# Altium PCB SV601187A.PcbDoc (part 2 of 2)
Units mil, origin at the board's own origin, x right, y up, seen from the top; angles counter-clockwise.
Board outline 3260 x 1865 mil, 4 copper layers (Top Layer, MidLayer1, MidLayer2, Bottom Layer), stack 61.2 mil thick; 103 components, 64 nets, 340 pads, 114 vias.
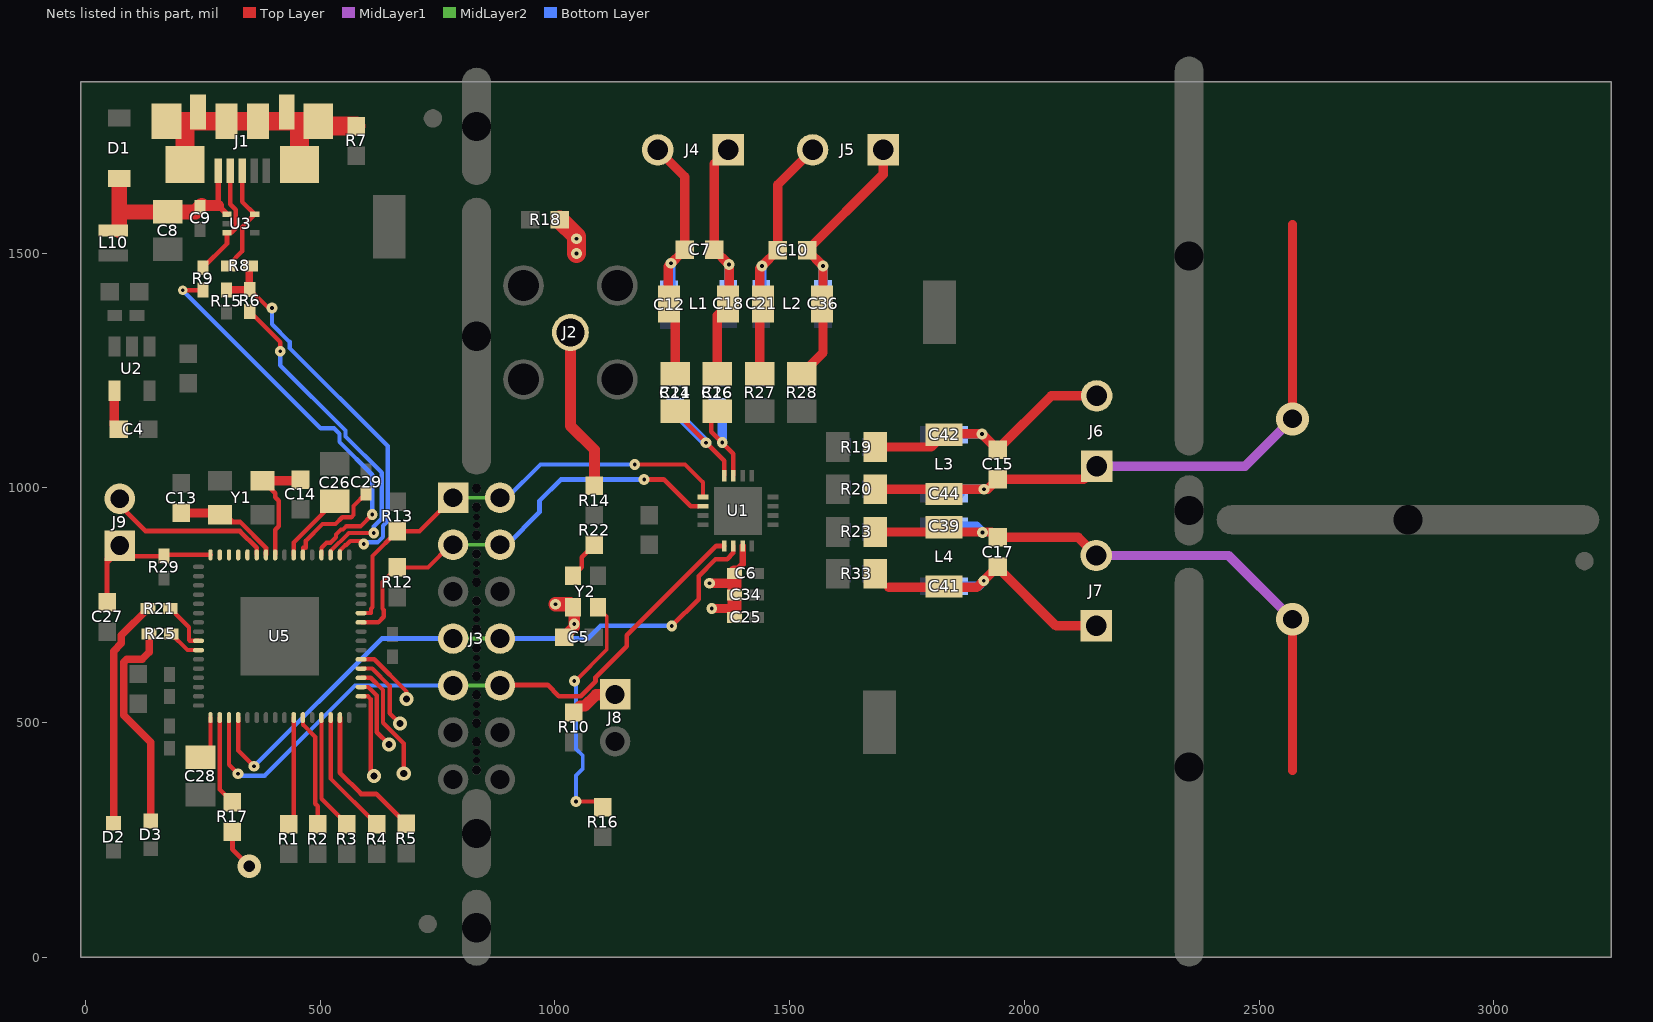
[diagram p4: the nets of this part, all layers, seen from the top]

## Via types
v1: diameter 23, hole 8, Top Layer to Bottom Layer, tented both sides, 77 vias
v2: diameter 19.68, hole 7.87, Top Layer to Bottom Layer, 18 vias
v3: diameter 20, hole 8, Top Layer to Bottom Layer, tented both sides, 8 vias
v4: diameter 30, hole 15, Top Layer to Bottom Layer, 5 vias
v5: diameter 50, hole 28, Top Layer to Bottom Layer, 2 vias
v6: diameter 50, hole 25, Top Layer to Bottom Layer, 2 vias
v7: diameter 70, hole 40, Top Layer to Bottom Layer, 2 vias

## Nets (pads, with @x,y where several pads share a name; then routed paths per layer and width w, separated by ;. In a path a pad name is that pad's centre, name@x,y a point inside that pad or via, vN(x,y) a via of type N, cw(c..) or ccw(c..) an arc to the next point about the centre after c; other vN are vias at no path point) (continued)
IN3A: C16.1 R26.1 U1.15 | length 228.4
  Top Layer w10: R26.1@1333,1150 1333,1120 1380.16,1072.84 U1.15@1380.16,1025.8
  Bottom Layer w10: C16.1@1356.58,1160.92 C16.1@1356.58,1166.08
  Bottom Layer w20: C16.1@1346,1171.5 1356.58,1160.92 v1(1356.58,1096.42)
IN3B: C11.2 R24.1 U1.16 | length 283.3
  Top Layer w10: R24.1@1256,1163 1256,1162 v1(1322,1096) 1360.47,1057.53 U1.16@1360.47,1025.8
  Bottom Layer w20: C11.2@1256,1171.5 1256,1162 v1(1322,1096)
INTB: J3.9 J3.10 U1.5 U5.19 | length 1382.5
  Top Layer w9: U5.19@305.71,510.77 305.71,410.3 v1(325,391)
  Top Layer w10: U1.5@1360.47,876.2 1343.58,876.2 1153.26,685.88 1153.26,662.88 1091.87,601.48 1091.79,601.48 1086.52,596.21 1086.52,587.98 1054.87,556.32 1008.47,556.32 984.62,580.18 J3.10@898,580.18 ; J3.10@898,580.18 898,579 J3.10@898,580.18
  MidLayer2 w8: J3.9@783,579 J3.10@873,579
  Bottom Layer w9: v1(325,391) 329,387 381.95,387 573.95,579 J3.9@783,579
JTAG_RST: C27.2 J9.1 R29.2 U5.64 | length 506.5
  Top Layer w10: C27.2@46,756.5 46,840 ; 46,840 71,865 81.38,854.62 J9.1@95.38,854.62 ; 46,840 46,850 J9.1@73,877 J9.1@95.38,854.62 ; J9.1@95.38,854.62 R29.2@167,854.62 R29.2@164.39,857.23 ; R29.2@164.39,857.23 U5.64@266.33,857.23 R29.2@164.39,857.23
JTAG_TCK: U5.63
JTAG_TDI: U5.61
JTAG_TDO: U5.60
JTAG_TEST: J9.2 U5.59 | length 352.9
  Top Layer w10: J9.2@67,969 128,908 329.09,908 364.78,872.32 U5.59@364.78,857.23
JTAG_TMS: U5.62
MSP_DM: R9.2 U5.52 | length 861.3
  Top Layer w9: v3(207,1421) 249.62,1421 R9.2@250,1421.38 ; U5.52@502.61,857.23 502.61,872.43 513.18,883 521.77,883 533.49,894.72 533.49,900.49 544.32,911.32 548.61,911.32 555.29,918 586,918 v1(611,943)
  Bottom Layer w9: v3(207,1421) 501,1127 529.28,1127 541,1115.28 541,1098 611,1028 v1(611,943)
MSP_DP: R6.1 R8.2 R15.2 U5.50 | length 922.6
  Top Layer w9: R6.1@350,1422.62 389.7,1382.92 v1(397.42,1382.92) ; U5.50@541.98,857.23 541.99,866.45 553.08,877.54 554.54,877.54 564,887 586.37,887 v1(592.84,880.53)
  Top Layer w16: R15.2@300,1421.62 R6.1@349,1421.62 ; R6.1@349,1421.62 349,1470.38 R6.1@349,1421.62
  Bottom Layer w9: v1(397.42,1382.92) 397.42,1348.58 435,1311 435,1297.93 644,1088.93 644,929.33 634,919.33 634,895.72 622.28,884 596.3,884 v1(592.84,880.53)
MSP_PUR: R6.2 U5.51 | length 710.5
  Top Layer w9: R6.2@350,1375.38 415,1310.38 v1(415,1291) ; U5.51@522.3,857.23 522.3,865.14 561,903.84 613.84,903.84 v1(614,904)
  Bottom Layer w9: v1(415,1291) 415,1261 554,1122 554,1109.38 631,1032.38 631,934.72 614,917.72 v1(614,904)
MSPACLK: R17.2 | length 88.4
  Top Layer w10: R17.2@313,267.5 313,230 v6(349,194)
NetC4_1: C4.1 U2.4 | length 85.4
  Top Layer w20: U2.4@61.6,1206.76 61.6,1133.91 C4.1@70.5,1125
NetC7_1: C7.1 C12.2 J4.2 L1.2 R24.2 | length 630.4
  Top Layer w20: J4.2@1219,1720 1276.5,1662.5 C7.1@1276.5,1507 ; R24.2@1256,1243 1256,1377.04 1241.04,1392 v1@1241.04,1471.54 ; v1@1241.04,1471.54 C7.1@1276.5,1507 ; v1@1241.04,1471.54 C7.1@1276.5,1507
  Bottom Layer w20: C12.2@1243,1421.54 1246.98,1425.51 v1(1246.98,1478.46)
NetC7_2: C7.2 C18.1 J4.1 L1.1 R26.2 | length 565.4
  Top Layer w20: R26.2@1346,1243 1346,1367.04 1370.96,1392 v1(1370.96,1475.54) C7.2@1339.5,1507 1339.5,1690.5 J4.1@1369,1720
  Bottom Layer w20: C18.1@1368.99,1423.5 1370.96,1425.46 v1(1370.96,1475.54)
NetC10_1: C10.1 C21.2 J5.2 L2.2 R27.2 | length 798.1
  Top Layer w20: J5.2@1549,1720 1474.5,1645.5 C10.1@1474.5,1506 v1(1441,1472.5) v1@1436,1467.5 ; v1@1436,1467.5 R27.2@1436,1243 v1@1436,1467.5
  Bottom Layer w20: C21.2@1439.07,1423.5 1441,1425.43 v1(1441,1472.5)
NetC10_2: C10.2 C36.1 J5.1 L2.1 R28.2 | length 625.4
  Top Layer w20: R28.2@1526,1243 1570.96,1287.96 1570.96,1392 v1(1570.96,1472.54) C10.2@1537.5,1506 1699,1667.5 J5.1@1699,1720
  Bottom Layer w20: C36.1@1570.96,1423.5 v1(1570.96,1472.54)
NetC13_2: C13.2 U5.58 Y1.3 | length 226.3
  Top Layer w10: Y1.3@286.72,942.58 299.11,942.58 314.44,927.26 329.64,927.26 384.47,872.43 U5.58@384.46,857.23
  Top Layer w20: C13.2@204,946.5 282.8,946.5 Y1.3@286.72,942.58
NetC14_2: C14.2 U5.57 Y1.1 | length 257.3
  Top Layer w10: Y1.1@377.28,1015.42 404.16,988.54 404.16,979.96 411.87,972.25 411.87,918.19 404.16,910.47 U5.57@404.15,857.23
  Top Layer w20: Y1.1@377.28,1015.42 455.92,1015.42 C14.2@458,1017.5
NetC15_1: C15.1 C42.2 J6.2 L3.2 R19.2 | length 594.7
  Top Layer w20: R19.2@1682,1087 1801.04,1087 1829,1114.96 v1(1909.54,1114.96) C15.1@1943,1081.5 2057.5,1196 J6.2@2154,1196
  Bottom Layer w20: C42.2@1860.5,1112.99 1862.46,1114.96 v1(1909.54,1114.96)
NetC15_2: C15.2 C44.1 J6.1 L3.1 R20.2 | length 1654.8
  Top Layer w20: J6.1@2154,1046 2126.5,1018.5 C15.2@1943,1018.5 1921.5,997 v1(1914,997) ; v7(2571,1147) 2571,1561 ; v1(1914,997) R20.2@1682,997 v1(1914,997)
  MidLayer1 w20: J6.1@2154,1046 2470,1046 v7(2571,1147)
  Bottom Layer w20: C44.1@1860.5,987.01 1870.49,997 v1(1914,997)
NetC17_1: C17.1 C39.2 J7.2 L4.2 R23.2 | length 1592.4
  Top Layer w20: J7.2@2153,856 2114.5,894.5 1942,894.5 C17.1@1930.5,906 ; 2571,398 v7(2571,720) ; C17.1@1930.5,906 R23.2@1682,906 C17.1@1930.5,906
  MidLayer1 w20: J7.2@2153,856 2435,856 v7(2571,720)
  Bottom Layer w20: C39.2@1860.5,917.96 1898.04,917.96 v1(1911,905)
NetC17_2: C17.2 C41.1 J7.1 L4.1 R33.2 | length 808.9
  Top Layer w20: 1710.96,788.04 1829,788.04 1898.54,788.04 ; J7.1@2153,706 2067.5,706 ; 1898.54,788.04 C17.2@1942,831.5 ; 1898.54,788.04 C17.2@1942,831.5 ; C17.2@1942,831.5 2067.5,706 ; C17.2@1942,831.5 2067.5,706
  Bottom Layer w20: C41.1@1860.5,790.01 1901.49,790.01 v1(1913.46,801.98)
NetC26_1: C26.1 U5.55 | length 150
  Top Layer w9: U5.55@443.54,857.23 443.54,883.54 C26.1@531,971
NetC28_1: C28.1 U5.17 | length 132.7
  Top Layer w9: U5.17@266.33,510.77 266.5,510.6 C28.1@266.5,439 ; C28.1@266.5,439 245,417.5 C28.1@266.5,439
NetD2_1: D2.1 R21.2 | length 487.9
  Top Layer w16: D2.1@60,285.53 60,652.15 76.7,668.85 76.7,686.32 R21.2@133.38,743
NetD3_1: D3.1 R25.2 | length 463.6
  Top Layer w16: R25.2@135.38,689 135.38,650.13 120.43,635.18 88.33,635.18 81.3,628.15 81.3,515.85 139,458.15 139,304.53 D3.1@139,290.53
NetJ1_2: J1.2 R9.1 U3.3 | length 246.1
  Top Layer w10: R9.1@250,1468.62 301.47,1520.09 U3.3@301.47,1543.32 310.26,1543.32 320.31,1553.37 320.31,1592.32 308.41,1604.22 J1.2@308.41,1675.49
NetJ1_3: J1.3 R8.1 U3.5 | length 236.7
  Top Layer w9: R8.1@304.38,1473 304.38,1474.47 333.81,1503.91 333.81,1555.97 U3.5@360.53,1582.69 334,1609.21 J1.3@334,1675.49
NetJ1_6: J1.6 J1.7 J1.8 J1.9 J1.10 J1.11 J1.12 J1.13 R7.2 | length 941.5
  Top Layer w40: J1.13@178,1781 J1.8@495.42,1781 J1.10@367.46,1781 J1.11@300.54,1781 ; J1.7@211.95,1688.48 211.95,1779.95 ; J1.6@456.05,1688.48 456.05,1777.95 ; J1.8@505.92,1770.5 R7.2@577,1770.5 ; J1.11@300.54,1781 211.95,1781 239.51,1781 J1.11@300.54,1781
NetJ2_1: J2.1 R14.1 | length 347.6
  Top Layer w23: J2.1@1033,1331 1033,1132 1084,1081 R14.1@1084,1004.5
NetR1_1: R1.1 U5.26 | length 231.6
  Top Layer w9: R1.1@433,283.5 443.54,294.03 U5.26@443.54,510.77
NetR2_1: R2.1 U5.27 | length 240.4
  Top Layer w9: U5.27@463.22,510.77 463.23,495.57 489.61,469.19 489.61,327.11 495,321.72 R2.1@495,283.5
NetR3_1: R3.1 U5.29 | length 249.8
  Top Layer w9: U5.29@502.61,510.77 502.61,337.89 R3.1@557,283.5
NetR4_1: R4.1 U5.30 | length 267.7
  Top Layer w9: U5.30@522.3,510.77 522.3,381.2 R4.1@620,283.5
NetR5_1: R5.1 U5.31 | length 303.7
  Top Layer w10: U5.31@541.98,510.77 541.99,393.02 587,348 619.5,348 R5.1@683,284.5
NetR16_2: R16.2 Y2.1 | length 527
  Top Layer w8: v1(1041.4,588.82) 1043.71,588.82 1110.43,655.55 1110.43,726.68 Y2.1@1091.57,745.54 ; v1(1045,332) 1089.5,332 R16.2@1102,319.5
  Bottom Layer w8: v1(1041.4,588.82) 1045,585.23 1045,444 1059.5,429.5 1059.5,401.92 1045,387.42 v1(1045,332)
NetR17_1: R17.1 U5.18 | length 191.5
  Top Layer w9: U5.18@286.01,510.77 286.02,357.48 R17.1@313,330.5
NetR21_1: R21.1 U5.9 | length 104.7
  Top Layer w9: R21.1@180.62,743 220.46,703.16 220.46,675.85 222.16,674.16 U5.9@240.77,674.16
NetR22_1: R22.1 Y2.3 | length 95.5
  Top Layer w10: Y2.3@1038.43,812.46 1057.28,831.32 1057.28,851.78 R22.1@1084,878.5 R22.1@1091.46,871.04
NetR25_1: R25.1 U5.10 | length 72.5
  Top Layer w9: R25.1@182.62,689 217.15,654.47 U5.10@240.77,654.47
P3.0: U5.34 | length 190.2
  Top Layer w9: U5.34@587.23,556.05 601.95,556.05 607.54,550.46 607.54,393.46 v4(615,386)
P3.1: U5.35 | length 156.3
  Top Layer w9: U5.35@587.23,575.73 602.27,575.73 620.54,557.46 620.54,479.46 v4(647,453)
P3.2: U5.36 | length 252.9
  Top Layer w9: U5.36@587.23,595.42 607.58,595.42 633.54,569.46 633.54,499.69 678,455.23 v4(678,392)
P3.3: U5.37 | length 165.3
  Top Layer w9: U5.37@587.23,615.1 610.9,615.1 648,578 648,520 v4(670,498)
P3.4: U5.38 | length 141.3
  Top Layer w9: U5.38@587.23,634.79 615.21,634.79 684,566 v4(684,550)
SCL: J3.1 J3.2 R13.1 U1.1 U5.43 | length 960.7
  Top Layer w9: U5.43@587.23,733.21 608.21,733.21 608.21,742.44 611.54,745.76 611.54,855.04 R13.1@664,907.5 711.5,907.5 J3.1@783,979 ; v1(1170,1050) 1254.39,1050 1277,1050 1315.2,1011.8 1315.2,989.2 U1.1@1315.2,980.53
  MidLayer2 w8: J3.1@783,979 J3.2@883,979
  Bottom Layer w9: J3.2@898,979 969,1050 v1(1170,1050)
SD: J3.7 J3.8 U1.6 U5.20 | length 1345.6
  Top Layer w9: U5.20@325.39,510.77 325.4,440.61 v1(359,407)
  Top Layer w10: v1(1249,706) 1306.2,763.2 1306.2,812.2 1342,848 1366.77,848 1380.16,861.39 U1.6@1380.16,876.2
  MidLayer2 w8: J3.7@783,679 J3.8@873,679
  Bottom Layer w10: v1(359,407) 631,679 J3.7@783,679 ; J3.8@898,679 1070.23,679 1097.23,706 v1(1249,706)
SDA: J3.3 J3.4 R12.1 U1.2 U5.42 | length 915
  Top Layer w9: U5.42@587.23,713.53 623.53,713.53 635.46,725.46 635.46,739.98 632.8,742.64 632.8,799.3 R12.1@664,830.5 729.5,830.5 778,879 J3.3@783,879
  Top Layer w10: v1(1190,1018) 1232,1018 1289.47,960.53 U1.2@1306.2,960.53
  MidLayer2 w8: J3.3@783,879 J3.4@883,879
  Bottom Layer w10: J3.4@898,879 967,948 967,972 1013,1018 v1(1190,1018)
VBUS: C8.1 C9.1 D1.1 J1.1 L10.1 U3.1 | length 429.4
  Top Layer w12: J1.1@282.82,1675.49 282.82,1601.34 U3.1@301.47,1582.69
  Top Layer w24: C9.1@247.72,1601.34 282.82,1601.34
  Top Layer w32: L10.1@71,1548.57 72,1549.57 72,1593.32 ; D1.1@72,1658.53 72,1593.32 ; C9.1@247.72,1601.34 C9.1@244,1597.62 234.38,1588 C8.1@175,1588 77.32,1588 72,1593.32
VDD: C5.1 C6.1 C25.1 C34.1 J8.1 R10.2 R18.2 U1.7 Y2.4 | length 587.7
  Top Layer w14: C6.1@1382.38,820 1399.84,837.46 U1.7@1399.84,876.2
  Top Layer w20: v1(1329,797) 1379.88,797 1382.38,799.5 ; v1(1334,743) 1380.88,743 1382.38,744.5
  Top Layer w24: C5.1@1019.5,682 1041,703.5 1041,742.96 Y2.4@1038.43,745.54 ; R10.2@1040,521.5 1053.83,535.32 1063.56,535.32 1087.42,559.18 ; J8.1@1128,560 J8.1@1128,559.18 ; 1087.42,559.18 J8.1@1128,559.18 ; 1087.42,559.18 J8.1@1128,559.18
  Top Layer w30: v1(1001,752) 1031.96,752 Y2.4@1038.43,745.54 ; 1382.38,744.5 C34.1@1382.38,772 1382.38,799.5 C6.1@1382.38,820
  Top Layer w40: R18.2@1010.5,1571 1046,1535.5 v1(1046,1499)
  other v1: 1041,710 1046,1530.77
VUSB: C29.1 U5.54 | length 223.9
  Top Layer w9: U5.54@463.22,857.23 463.23,872.43 ; C29.1@598,988.38 571,961.38 571,942.48 566.02,937.5 547.12,937.5 532.62,923 505.2,923 469.42,887.21 469.42,872.43 ; 463.23,872.43 469.42,872.43 ; 463.23,872.43 469.42,872.43
pads on no net: FID1.1 FID2.1 FID3.1 J1.4 LBL1.0 U3.2 U5.1 U5.2 U5.3 U5.4 U5.5 U5.6 U5.7 U5.8 U5.12 U5.13 U5.22 U5.23 U5.24 U5.25 U5.28 U5.32 U5.33 U5.41 U5.44 U5.45 U5.46 U5.47 U5.48

## Polygon pours and split planes (outlines as drawn)
GND on MidLayer1 "Bottom Layer-No Net" (solid, pour order 11): 20,20 793,20 793,1840 20,1840 20,20
GND on MidLayer1 "Bottom Layer-No Net" (solid, remove dead copper, pour order 14): 890,35 1535,35 1535,1120 1215,1120 1215,1500 890,1500
+3.3V on MidLayer2 "Bottom Layer-No Net" (solid, pour order 8): 20,770 790,770 790,1840 20,1840
+3.3V on MidLayer2 "Bottom Layer-No Net" (solid, pour order 9): 17,17 791,17 791,770.5 17,770.5 17,17
VDD on MidLayer2 "Bottom Layer-No Net" (solid, remove dead copper, pour order 12): 987.46,510 1403.46,510 1403.46,1725.95 987.46,1725.95
GND on MidLayer2 "Bottom Layer-No Net" (solid, remove dead copper, pour order 13): 890,35 1535,35 1535,1120 1215,1120 1215,1500 890,1500
+3.3V on MidLayer2 "MidLayer2-No Net" (solid, remove dead copper, pour order 10): 898,379 1022,503 1206,503 1206,171 1138,103 1130,95 898,95

## Keep-outs
Keep-Out Layer:
  lines w8: -15,-5 3255,-5 3255,1870 -15,1870 -15,-5
  text ".Layer_Name" at 577,-858.49 h60

## Other copper
Top Layer:
  rectangle net NetC17_1: 2396,33 3221,583
  rectangle net NetC15_2: 2396,1281 3221,1831
  text ".Layer_Name" at 577,-858.49 h60
MidLayer1:
  pour cut-out: 154.5,894 154.7,894.2 154.7,1052.87 485.63,1052.87 497.5,1040.99 497.5,888
MidLayer2:
  pour cut-out: 154.5,894 154.7,894.2 154.7,1052.87 485.63,1052.87 497.5,1040.99 497.5,888
Bottom Layer:
  text ".Layer_Name" at 577,-858.49 h60

## Silkscreen, mask and mechanical layers (free items; w line width, h text height)
Top Overlay:
  lines w10: 1238,693 1565,693 1565,1106 1238,1106 1238,693
  text "GND" at 912,1808 h30
  text "CH2" at 1891,1659 h60 r90
  text "CH3" at 1117,1655 h60 r90
  text "GND" at 1787,1472 h30
  text "GND" at 602,1425 h30
  text "CH1" at 2001,1317 h60
  text "SENSOR CH1" at 2500,1264 h55 r90
  text "+5V" at 417,1165 h30
  text "SENSOR:" at 2646,1154 h40
  text "20.9mm x 13.9mm" at 2647,1079 h40
  text "FDC" at 1250,1050 h40
  text "1 layer" at 2649,1004 h40
  text "or" at 1030,940 h30 r90
  text "SBW" at 161,898 h25 r90
  text "SENSOR:" at 2650,819 h40
  text "20.9mm x 13.9mm" at 2648,747 h40
  text "1 layer" at 2650,672 h40
  text "CH0" at 1992,498 h60
  text "GND" at 1748,468 h30
  text "+3.3V" at 1219,438 h30 r90
  text "4-Channel FDC EVM" at 1262,319 h60
  text "GND" at 906,255 h30
  text "SENSOR CH0" at 2500,64 h55 r90
  text "GND" at 179,52 h30
  text "ACLK" at 360,43 h30 r90
  text ".Layer_Name" at 577,-858.49 h60
Bottom Overlay:
  region: 594,597 594,897 494,897 494,597
  text ".PRJ_Number" at 594,1813 h60 r90
  text "Rev" at 691,1801 h60 r90
  text ".PCB_Rev" at 696,1608 h60 r90
  text "TCK" at 100,1042 h25
  text "SCL" at 1030,968 h30
  text "SDA" at 1039.37,865 h30
  text "TDIO" at 113,791 h25
  text "ADDR" at 1075.3,762 h30
  text "SD" at 1025,660 h30
  text "INTB" at 1060,565 h30
  text "©" at 2124,473 h105
  text ".CopyrightYear" at 2025,472 h60
  text "GND" at 1033.25,469.61 h30
  text "3.3V" at 1061,363 h30
  text "MADE IN U.S." at 2127,348 h60
  text ".Layer_Name" at 577,-858.49 h60
Top Paste:
  text ".Layer_Name" at 577,-858.49 h60
Bottom Paste:
  text ".Layer_Name" at 577,-858.49 h60
Top Solder:
  text ".Layer_Name" at 577,-858.49 h60
  text ".Layer_Name" at 577,-858.49 h60
Bottom Solder:
  text ".Layer_Name" at 577,-858.49 h60
Drill Guide:
  text ".Layer_Name" at 577,-858.49 h60
M1 Board Outline:
  lines w8: -10,0 3253,0 3253,1865 -10,1865 -10,0
  text ".Layer_Name" at 577,-858.49 h60
M2 Board Dimensions:
  rectangle: 124.5,-410.5 499.5,-285.5
  rectangle: -0.5,-285.5 124.5,-160.5
  lines w7: -0.5,-285.5 999.5,-285.5 ; 124.5,-410.5 124.5,-160.5 ; 249.5,-410.5 249.5,-160.5 ; 499.5,-410.5 499.5,-160.5 ; 749.5,-410.5 749.5,-160.5 ; -0.5,-410.5 -0.5,-160.5 999.5,-160.5 999.5,-410.5 -0.5,-410.5
  lines w10: -0.5,-475.5 -0.5,-455.5 ; 59.5,-485.5 -0.5,-465.5 ; 59.5,-445.5 -0.5,-465.5 ; 223.58,-465.5 -0.5,-465.5 ; 775.42,-465.5 999.5,-465.5 ; 939.5,-485.5 999.5,-465.5 ; 939.5,-445.5 999.5,-465.5 ; 999.5,-475.5 999.5,-455.5
  text "1000 (mil)" at 233.58,-501.49 h60
  text ".Layer_Name" at 577,-858.49 h60
M3 3D STEP Top:
  text ".Layer_Name" at 577,-858.49 h60
M4 3D STEP Bottom:
  text ".Layer_Name" at 577,-858.49 h60
M5 Assembly Top:
  lines w10: -292,-930.17 6308,-930.17 ; -292,-726.83 6310,-726.83 ; -292,-523.5 -292,-1133.5 3713,-1133.5 6310,-1133.5 6310,-523.5 -291.5,-523.5 -291.5,-1133.5 1284,-1133.5 ; 2173,-1133.5 2173,-523.5 ; 3440,-726.83 3440,-523.5 ; 4280,-726.83 4280,-523.5 ; 4902,-1140 4902,-937.17
  text "COMPONENTS MARKED 'DNP' SHOULD NOT BE POPULATED." at 1153.5,-318.5 h60
  text "ASSEMBLY VARIANT:" at 1153,-434 h60
  text ".VariantName" at 2189,-434 h60
  text "PCB VIEWED FROM TOP SIDE" at -228.5,-655.67 h60
  text "BOARD #:" at 2248,-655.67 h60
  text ".PRJ_Number" at 2793.5,-655.67 h60
  text "REV:" at 3638,-655.67 h60
  text ".PCB_Rev" at 3929.5,-655.67 h60
  text "SVN REV:" at 4476,-655.67 h60
  text ".VersionControl_RevNumber" at 4982,-655.67 h60
  text "IGNORE ->" at -228.5,-858.49 h60
  text "PLOT NAME =" at -228.5,-1064.34 h60
  text ".plot_File_Name" at 577,-1064.34 h60
  text "GENERATED    :" at 2250,-1064.34 h60
  text ".Print_Date" at 3119.5,-1064.34 h60
  text ".Print_Time" at 3848.5,-1064.34 h60
  text "TEXAS INSTRUMENTS" at 5113,-1064.34 h60
M6 Assembly Bottom:
  lines w10: -292.5,-727.33 6309.5,-727.33 ; -290.5,-930.67 6309.5,-930.67 ; 1115.5,-1140.5 1115.5,-937.67 ; 1737.5,-727.33 1737.5,-524 ; 2577.5,-727.33 2577.5,-524 ; 3844.5,-1134 3844.5,-524 ; 4733.5,-1134 6309,-1134 6309,-524 -292.5,-524 -292.5,-1134 2304.5,-1134 6309.5,-1134 6309.5,-524
  text "COMPONENTS MARKED 'DNP' SHOULD NOT BE POPULATED." at 6102,-318 h60
  text ".VariantName" at 5058,-434 h60
  text "ASSEMBLY VARIANT:" at 6097,-434 h60
  text ".VersionControl_RevNumber" at 1035.5,-656.17 h60
  text "SVN REV:" at 1541.5,-656.17 h60
  text ".PCB_Rev" at 2088,-656.17 h60
  text "REV:" at 2379.5,-656.17 h60
  text ".PRJ_Number" at 3224,-656.17 h60
  text "BOARD #:" at 3769.5,-656.17 h60
  text "PCB VIEWED FROM BOTTOM SIDE" at 6246,-656.17 h60
  text "IGNORE ->" at 2547.85,-858.49 h60
  text "TEXAS INSTRUMENTS" at 904.5,-1064.84 h60
  text ".Print_Time" at 2169,-1064.84 h60
  text ".Print_Date" at 2898,-1064.84 h60
  text "GENERATED    :" at 3767.5,-1064.84 h60
  text ".plot_File_Name" at 5440.5,-1064.84 h60
  text "PLOT NAME =" at 6246,-1064.84 h60
M9 Title Sheet:
  drawing of 54 lines, arcs and shapes, not listed
  text "1" at 739.84,8036.5 h70
  text "2" at 3235.5,8036.5 h70
  text "3" at 5724.84,8036.5 h70
  text "4" at 8231.51,8036.5 h70
  text "5" at 10730.5,8036.5 h70
  text "6" at 13235.5,8036.5 h70
  text "A" at -416.5,6893.5 h70
  text "A" at 14383.5,6893.5 h70
  text "B" at -416.5,4513.5 h70
  text "B" at 14383.5,4513.5 h70
  text "C" at -416.5,2138.5 h70
  text "C" at 14383.5,2138.5 h70
  text "PROJECT TITLE:" at 11343.5,277.5 h45
  text ".PRJ_Title" at 11393.5,144.17 h70
  text "DESIGNED FOR:" at 11343.5,-23.5 h45
  text ".PRJ_Customer" at 11393.5,-163.5 h70
  text "D" at -416.5,-231.5 h70
  text "D" at 14383.5,-231.5 h70
  text "FILE NAME:" at 11343.5,-323.5 h45
  text ".PCB_File_Name_No_Path" at 11393.5,-443.5 h70
  text "Texas Instruments (TI) and/or its licensors do not warrant the accuracy or completeness of this specification" at 6374,-605.34 h45
  text "ENGINEER:" at 11343.5,-613.5 h45
  text "LAYOUT BY:" at 12848.5,-613.5 h45
  text "or any information contained therein. TI and/or its licensors do not warrant that this design will meet" at 6329.01,-718 h45
  text ".PRJ_Engineer" at 11393.5,-768.49 h70
  text ".PCB_Layout" at 12899,-768.49 h70
  text "the specifications, will be suitable for your application or fit for any particular purpose, or will operate in" at 6329.01,-830.67 h45
  text ".Layer_Name" at 577,-858.49 h60
  text "ALTIUM DESIGNER VERSION:" at 12848.5,-923.5 h45
  text "an implementation. TI and/or its licensors do not warrant that the design is production worthy. You should" at 6329.01,-943.33 h45
  text "completely validate and test your design implementation to confirm the system functionality for your application." at 6374,-1056 h45
  text ".print_Scale" at 11393.5,-1056.83 h70
  text ".Application_BuildNumber" at 12899,-1056.83 h70
  text "1" at 739.84,-1263.5 h70
  text "2" at 3235.5,-1263.5 h70
  text "3" at 5724.84,-1263.5 h70
  text "4" at 8231.51,-1263.5 h70
  text "5" at 10730.5,-1263.5 h70
  text "6" at 13235.5,-1263.5 h70
M10 Fab Notes:
  drawing of 212 lines, arcs and shapes, not listed
  text "DESIGN INFORMATION" at 12381.02,6810 h60
  text "(REFER ALSO ARRAY/PANEL PROFILING INFORMATION)" at 12019.46,6648.29 h60
  text "BOARD SIZE" at 11333.46,6644 h60
  text "3250MIL" at 11795.78,6516.18 h60
  text "X" at 12301.46,6516.18 h60
  text "1865MIL" at 12532.78,6516.18 h60
  text "Number of Layers :" at 11736.46,6319 h60
  text "4" at 12831.27,6309 h60
  text "MIN. TRACK WIDTH:" at 11736.46,6180 h60
  text "4" at 12832.7,6180 h60
  text "MIL" at 12987.46,6180 h60
  text "MIN. CLEARANCE:" at 11736.46,6048 h60
  text "4" at 12832.7,6048 h60
  text "MIL" at 12987.46,6048 h60
  text "MIN. VIA PAD SIZE:" at 11736.46,5916 h60
  text "20" at 12802.71,5916 h60
  text "MIL" at 12987.46,5916 h60
  text "0.05mm (2MIL)" at 12431.46,5774.29 h60
  text "MINIMUM ANNULAR RING" at 11407.23,5770 h60
  text "EXTERNAL" at 13139.46,5770 h60
  text "PER" at 11607.23,5652 h60
  text "IPC-D-275 CLASS 2 LEVEL C" at 11827.23,5652 h60
  text "MIL, HOLES" at 13315.46,5539.71 h60
  text "+/-" at 12923,5539 h60
  text "+/-" at 13777,5539 h60
  text "REGISTRATION TOLERANCES:" at 11407.23,5534 h60
  text "METAL" at 12607,5534 h60
  text "5" at 13183.2,5534 h60
  text "3" at 14016.2,5534 h60
  text "MIL" at 14132.46,5534 h60
  text "MATERIAL:" at 11332.46,5324.54 h60
  text "FR-4 High Tg" at 12318.9,5184.21 h60
  text "FR-408" at 11753.46,5175.64 h60
  text "X" at 12165.46,5175.64 h60
  text "OTHER" at 13241.46,5175.64 h60
  text "62 MIL (1.6mm) +/-10%" at 12073.56,5012.92 h60
  text "THICKNESS:" at 11407.23,5008.64 h60
  text "X" at 11945.4,5008.64 h60
  text "OTHER" at 13358.46,5008.64 h60
  text "TOLERANCE:" at 11407.23,4850.64 h60
  text "X" at 12246.53,4850.64 h60
  text "ANSI IPC-6012 TYPE 3 CLASS 2" at 12433.48,4850.64 h60
  text "OTHER +/-" at 12433.46,4694.64 h60
  text "BOW & TWIST:" at 11407.23,4537.64 h60
  text "X" at 12246.53,4537.64 h60
  text "ANSI IPC-6012 TYPE 3 CLASS 2" at 12433.48,4537.64 h60
  text "OTHER +/-" at 12433.46,4379.13 h60
  text "COPPER THICKNESS (FINISHED):" at 11332.46,4243.64 h60
  text "1.4MIL (1oz)" at 12212.46,4090.92 h60
  text "2MIL (1.4oz)" at 12979.46,4090.92 h60
  text "2.8MIL (2oz)" at 13706.46,4090.92 h60
  text "OUTER:" at 11689.46,4086.64 h60
  text "X" at 12084,4086 h60
  text "1.4MIL (1oz)" at 12212.46,3933.92 h60
  text "2.8MIL (2oz)" at 12979.46,3933.92 h60
  text "N/A" at 13706,3934.29 h60
  text "INNER SIGNAL:" at 11400.38,3929.64 h60
  text "X" at 12085.42,3929.64 h60
  text "DRILLING:" at 11332.46,3790.64 h60
  text "REFERENCE:" at 11407.23,3673.64 h60
  text "X" at 12055.46,3673.64 h60
  text "AS SHOWN" at 12242.46,3673.64 h60
  text "X" at 12956.46,3673.64 h60
  text "NC_DRILL FILES" at 13093.46,3673.64 h60
  text "PTH MIN COPPER THICKNESS:" at 11407.23,3515.64 h60
  text "X" at 12757.46,3515.64 h60
  text "1MIL" at 12894.46,3515.64 h60
  text "OTHER" at 13391.46,3515.64 h60
  text "BOARD FINISH:" at 11332.46,3356.64 h60
  text "SILKSCREEN:" at 11487.68,3238.64 h60
  text "X" at 12436.46,3238.64 h60
  text "TOP" at 12562.46,3238.64 h60
  text "X" at 12946.46,3238.64 h60
  text "BOTTOM" at 13073.46,3238.64 h60
  text "SILKSCREEN COLOR:" at 11487.68,3071.64 h60
  text "X" at 12435.42,3071.64 h60
  text "WHITE" at 12562.46,3071.64 h60
  text "OTHER" at 13073.46,3071.64 h60
  text "SOLDER RESIST COLOR:" at 11487.68,2901.64 h60
  text "X" at 12651,2750 h60
  text "GREEN" at 12182.46,2742.44 h60
  text "BLUE" at 12773.46,2742.44 h60
  text "OTHER" at 13311.46,2742.44 h60
  text "IMMERSION GOLD (ENIG)" at 12393.46,2553.92 h60
  text "ENEPIG" at 13731,2550.64 h60
  text "SURFACE FINISH:" at 11332.46,2549.64 h60
  text "X" at 12206.51,2549.64 h60
  text "IMM. TIN/SILVER OR EQUIV" at 11662,2392.64 h60
  text "OTHER" at 13093.46,2392.64 h60
  text "ARRAY/PANEL:" at 11332.46,2213.64 h60
  text "CUT AND TRIM PER MECH LAYER 1" at 12393.46,2209.35 h60
  text "X" at 12209,2062 h60
  text "N.C. ROUTE" at 12393.46,2057.64 h60
  text "V. SCORE" at 13259.46,2057.64 h60
  text "CERTIFICATION:" at 11332.46,1920.64 h60
  text "MATERIALS AND WORKMANSHIP FOR ALL PCBS" at 12057.46,1920.64 h60
  text "TO MEET OR EXCEED THE REQUIREMENTS OF:" at 12057.46,1822.64 h60
  text "X" at 11683.96,1686.13 h60
  text "ANSI IPC-A-600F CLASS ->" at 11822.96,1686.13 h60
  text "X" at 13462.02,1686.13 h60
  text "2" at 13580.96,1686.14 h60
  text "1" at 13265.96,1684.64 h60
  text "3" at 13934.96,1684.64 h60
  text "X" at 11686.02,1526.64 h60
  text "UL 94V-0" at 11822.96,1526.64 h60
  text "X" at 12498.02,1526.64 h60
  text "RoHS" at 12634.96,1526.64 h60
  text "OTHER" at 13279.36,1526.64 h60
  text "PER ORDER" at 13676.42,1526.64 h60
  text "ADDITIONAL REQUIREMENTS:" at 11332.46,1385.64 h60
  text "MICROSECTION:" at 11407.23,1270.64 h60
  text "YES" at 12312.96,1270.64 h60
  text "REQUIRED" at 13174.46,1114.49 h60
  text "BARE BOARD ELEC. TEST:" at 11407.23,1111.64 h60
  text "NONE" at 12712.96,1111.64 h60
  text "X" at 13047.46,1111.64 h60
  text "PER ORDER" at 13766.46,1111.64 h60
  text "MANUFACTURER'S UL:" at 11407.23,954.64 h60
  text "RAIL" at 12572.96,950.35 h60
  text "METAL" at 13064.77,950.35 h60
  text "X" at 13440,950 h60
  text "SILK" at 13576.46,950.35 h60
  text ".Layer_Name" at 577,-858.49 h60
M11 Gerber Information:
  lines w10: -292,-930.17 6308,-930.17 ; -292,-726.83 6310,-726.83 ; -292,-523.5 -292,-1133.5 3713,-1133.5 6310,-1133.5 6310,-523.5 -291.5,-523.5 -291.5,-1133.5 1284,-1133.5 ; 2173,-1133.5 2173,-523.5 ; 3440,-726.83 3440,-523.5 ; 4280,-726.83 4280,-523.5 ; 4902,-1140 4902,-937.17
  text "ALL ARTWORK VIEWED FROM TOP SIDE" at -228.5,-655.67 h60
  text "BOARD #:" at 2248,-655.67 h60
  text ".PRJ_Number" at 2793.5,-655.67 h60
  text "REV:" at 3638,-655.67 h60
  text ".PCB_Rev" at 3929.5,-655.67 h60
  text "SVN REV:" at 4476,-655.67 h60
  text ".VersionControl_RevNumber" at 4982,-655.67 h60
  text "LAYER NAME =" at -228.5,-858.49 h60
  text "PLOT NAME =" at -228.5,-1064.34 h60
  text ".plot_File_Name" at 577,-1064.34 h60
  text "GENERATED    :" at 2250,-1064.34 h60
  text ".Print_Date" at 3119.5,-1064.34 h60
  text ".Print_Time" at 3848.5,-1064.34 h60
  text "TEXAS INSTRUMENTS" at 5113,-1064.34 h60
M12 Stackup:
  lines w6: 11365,7632.25 14230,7632.25 ; 11365,7744.85 14230,7744.85 ; 11286,6907 ccw(c11322,6907) 11322,6871 14235,6871 ccw(c14235,6907) 14271,6907 14271,7902 ccw(c14235,7902) 14235,7938 11322,7938 ccw(c11322,7902) 11286,7902 11286,6907
  text "Layer Stack Up Detail for: SV601187A.PcbDoc" at 11346,7819.02 h58
  text "Layer" at 11365,7702.85 h26
  text "Gerber" at 12072.2,7702.85 h26
  text "Copper" at 12433.65,7702.85 h26
  text "Dielectric" at 12837.55,7702.85 h26
  text "Dielectric" at 13259.64,7702.85 h26
  text "Dielectric" at 13786.9,7702.85 h26
  text "Name" at 11365,7650.85 h26
  text "Document" at 12072.2,7650.85 h26
  text "Thickness" at 12433.65,7650.85 h26
  text "Height" at 12837.55,7650.85 h26
  text "Material" at 13259.64,7650.85 h26
  text "Type" at 13786.9,7650.85 h26
  text "Top Solder Mask" at 11365,7573.68 h36
  text "(.GTS)" at 12072.2,7573.68 h36
  text "0.4mil" at 12837.55,7573.68 h36
  text "Solder Resist" at 13259.64,7573.68 h36
  text "Top Layer" at 11365,7462.53 h36
  text "(.GTL)" at 12072.2,7462.53 h36
  text "1.4mil" at 12433.65,7462.53 h36
  text "12.6mil" at 12837.55,7406.96 h36
  text "FR-4" at 13259.64,7406.96 h36
  text "Core" at 13786.9,7406.96 h36
  text "MidLayer1" at 11365,7351.39 h36
  text "(.G1)" at 12072.2,7351.39 h36
  text "1.4mil" at 12433.65,7351.39 h36
  text "30.4mil" at 12837.55,7295.81 h36
  text "FR-4" at 13259.64,7295.81 h36
  text "PrePreg" at 13786.9,7295.81 h36
  text "MidLayer2" at 11365,7240.24 h36
  text "(.G2)" at 12072.2,7240.24 h36
  text "1.4mil" at 12433.65,7240.24 h36
  text "12.6mil" at 12837.55,7184.67 h36
  text "FR-4" at 13259.64,7184.67 h36
  text "Core" at 13786.9,7184.67 h36
  text "Bottom Layer" at 11365,7129.09 h36
  text "(.GBL)" at 12072.2,7129.09 h36
  text "1.4mil" at 12433.65,7129.09 h36
  text "Bottom Solder Mask" at 11365,7017.95 h36
  text "(.GBS)" at 12072.2,7017.95 h36
  text "0.4mil" at 12837.55,7017.95 h36
  text "Solder Resist" at 13259.64,7017.95 h36
  text ".Layer_Name" at 577,-858.49 h60
M13 Component Bodies Top:
  text ".Layer_Name" at 577,-858.49 h60
M14 Component Bodies Bottom:
  text ".Layer_Name" at 577,-858.49 h60
M15 Courtyards Top:
  text ".Layer_Name" at 577,-858.49 h60
M16 Courtyards Bottom:
  text ".Layer_Name" at 577,-858.49 h60
Drill Drawing:
  text ".legend" at 3886,1076 h40
  text ".Layer_Name" at 577,-858.49 h60

## Dimensions
0,0 to 3250,0 on M2 Board Dimensions
0,0 to -10,1865 on M2 Board Dimensions

## Text inside footprints (layer, text, board x,y; h text height)
J1: M1 Board Outline "Board Edge" at 526.91,1922.73 h40 r180
Logo2: Bottom Overlay "not FCC approved for resale." at 1634.05,50.62 h60; Bottom Overlay "For evaluation only;" at 1521.68,104.01 h60
Logo3: Bottom Overlay "Pb" at 2094.25,166.18 h120